# Altium PCB 四进四出三电机.PcbDoc (part 3 of 3)
Units mm, origin at the board's own origin, x right, y up, seen from the top; angles counter-clockwise.
Board outline 122.4 x 87.4 mm, 2 copper layers (Top Layer, Bottom Layer); 150 components, 163 nets, 541 pads, 64 vias.
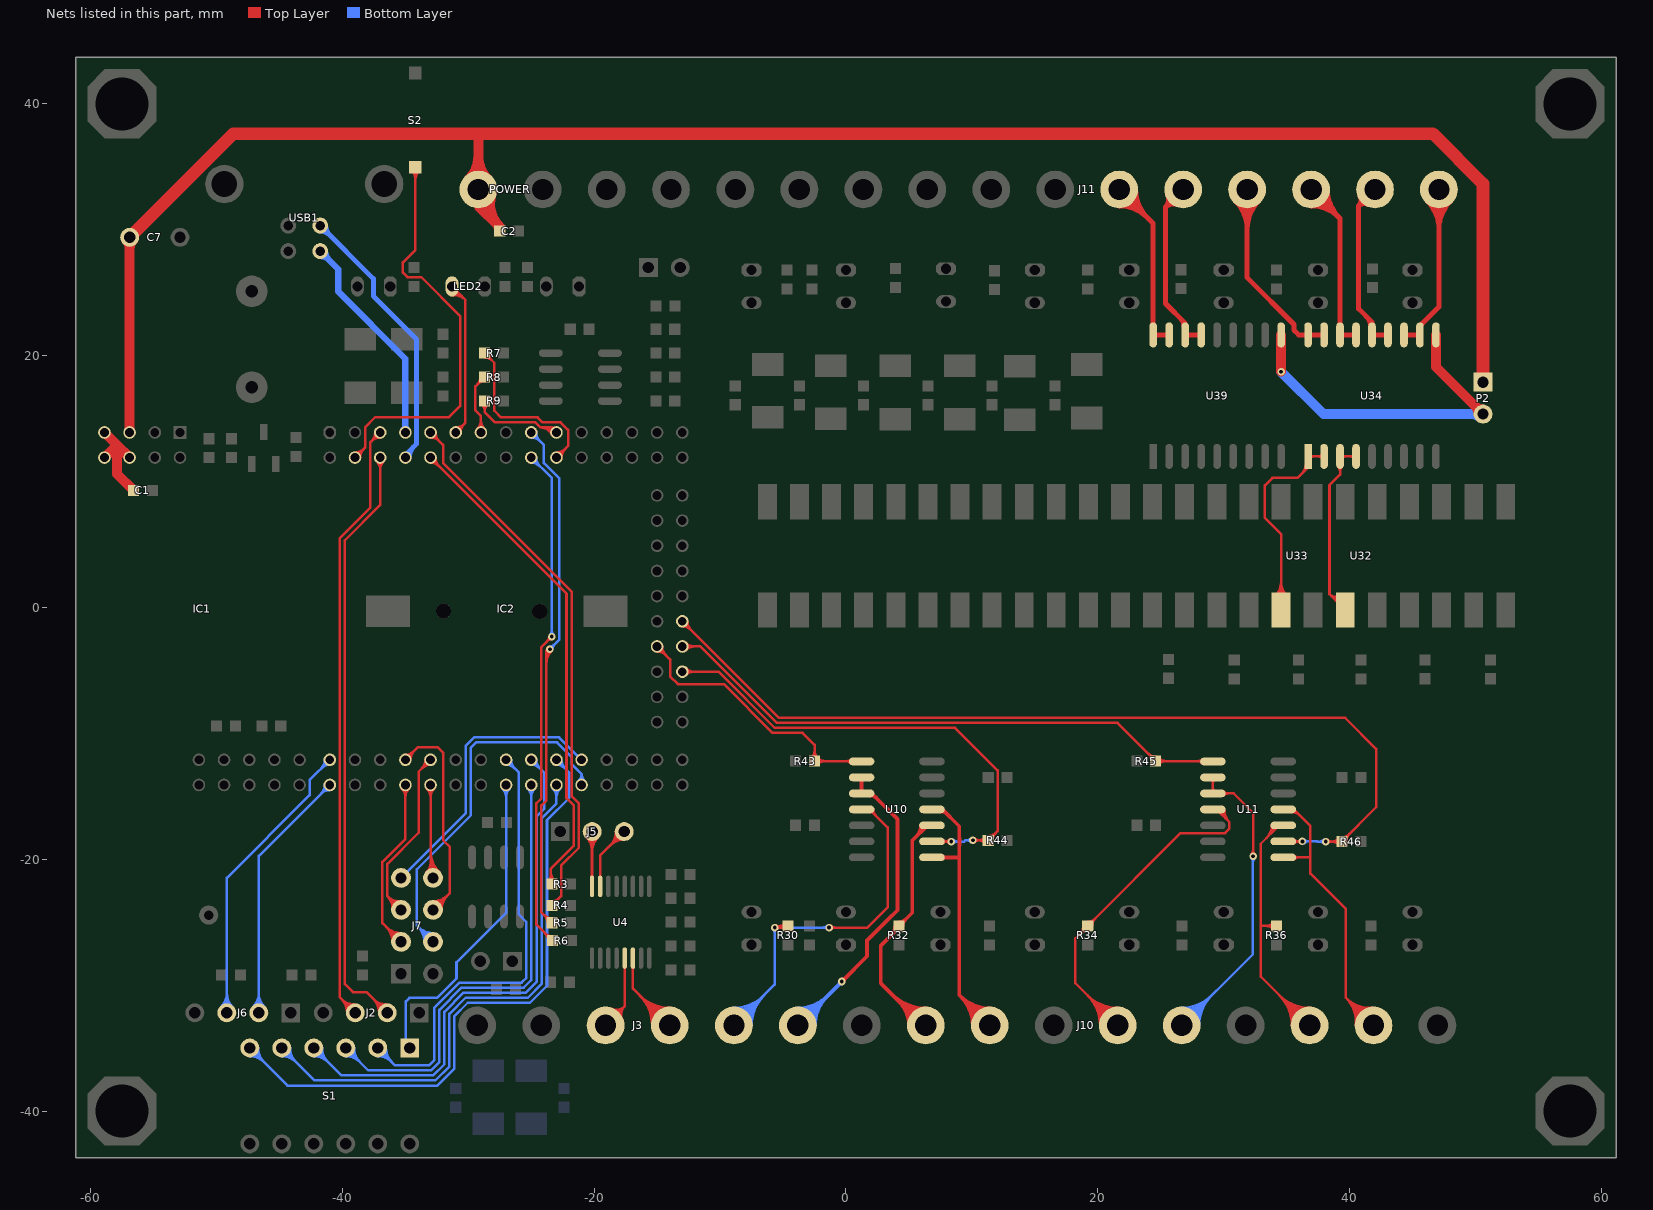
[diagram p3: the nets of this part, all layers, seen from the top]

## Via types
v1: diameter 0.6, hole 0.3, Top Layer to Bottom Layer, 64 vias

## Nets (pads, with @x,y where several pads share a name; then routed paths per layer and width w, separated by ;. In a path a pad name is that pad's centre, name@x,y a point inside that pad or via, vN(x,y) a via of type N, cw(c..) or ccw(c..) an arc to the next point about the centre after c; other vN are vias at no path point) (continued)
NetU32_3: U32.3 U34.3 U34.4 | length 20.1
  Top Layer w0.2: 38.572,0.888 ccw(c39.028,1.343) U32.3@39.4,0.817 ; 38.74,0.72 ccw(c39.167,1.147) U32.3@39.516,0.654 ; 38.908,0.552 ccw(c39.306,0.95) U32.3@39.631,0.491 ; U34.3@39.099,11.159 cw(c38.757,10.817) 39.24,10.817 cw(c39.723,10.817) U34.3@39.381,11.159 ; U32.3@39.284,0.981 cw(c38.889,1.539) 38.405,1.055 ; U34.3@39.381,11.859 cw(c39.723,11.517) 39.723,12 cw(c39.723,12.483) U34.3@39.381,12.141 ; U32.3@39.66,-0.2 38.405,1.055 ; U34.4@40.369,11.859 ccw(c40.027,11.517) 40.027,12 ccw(c40.027,12.483) U34.4@40.369,12.141 ; U34.4@40.51,12 U34.3@39.24,12 39.24,10.554 38.405,9.719 38.405,1.055
NetU33_3: U33.3 U34.1 U34.2 | length 23.3
  Top Layer w0.2: U33.3@34.1,0.91 ccw(c32.991,2.019) 34.56,2.019 ccw(c36.129,2.019) U33.3@35.02,0.91 ; U33.3@34.242,0.768 ccw(c33.474,1.536) 34.56,1.536 ccw(c35.646,1.536) U33.3@34.878,0.768 ; U33.3@34.56,-0.2 34.56,5.826 33.274,7.112 33.274,9.688 33.873,10.287 35.865,10.287 36.7,11.122 U34.1@36.7,12 U34.2@37.97,12 ; 36.233,10.655 ccw(c35.588,11.3) U34.1@36.5,11.3 ; 36.574,10.996 ccw(c36.271,11.3) U34.1@36.7,11.3 ; U34.1@36.841,11.859 cw(c37.183,11.517) 37.183,12 cw(c37.183,12.483) U34.1@36.841,12.141 ; U34.2@37.829,11.859 ccw(c37.487,11.517) 37.487,12 ccw(c37.487,12.483) U34.2@37.829,12.141
NRST: IC2.4 S2.1 | length 35.9
  Top Layer w0.2: IC2.4@-39,11.9 -38.2,12.7 -38.2,14.302 -37.389,15.113 -31.521,15.113 -30.645,15.989 -30.645,23.149 -33.736,26.24 -34.844,26.24 -35.204,26.6 -35.204,27.4 -34.2,28.404 S2.1@-34.2,34.95 ; IC2.4@-39,12.3 ccw(c-39,13.266) -38.317,12.583 ccw(c-37.634,11.9) IC2.4@-38.6,11.9 ; S2.1@-34.483,34.667 cw(c-35.166,33.984) -34.2,33.984 cw(c-33.234,33.984) S2.1@-33.917,34.667
OUTPUT1: J11.1 U34.11 U34.12 | length 21.8
  Top Layer w0.4: U34.12@44.32,21.65 U34.11@45.59,21.65 45.59,22.374 47.1,23.884 J11.1@47.1,33.2 ; J11.1@46.181,32.281 cw(c43.962,30.062) 47.1,30.062 cw(c50.238,30.062) J11.1@48.019,32.281 ; J11.1@46.464,32.564 cw(c44.927,31.027) 47.1,31.027 cw(c49.273,31.027) J11.1@47.736,32.564
OUTPUT2: J11.2 U34.13 U34.14 | length 16.2
  Top Layer w0.4: J11.2@40.845,32.643 cw(c40.251,32.361) 40.716,31.896 ; 41.392,23.044 cw(c40.698,22.35) U34.14@41.68,22.35 ; J11.2@41.463,32.025 ccw(c41.181,31.431) 40.716,31.896 ; J11.2@42.02,33.2 40.716,31.896 ; U34.13@43.05,21.65 U34.14@41.78,21.65 41.78,22.657 40.716,23.721 40.716,31.896
OUTPUT3: J11.3 U34.15 U34.16 | length 22.1
  Top Layer w0.4: J11.3@36.94,31.9 cw(c36.94,28.762) 39.159,30.981 cw(c41.378,33.2) J11.3@38.24,33.2 ; J11.3@36.94,32.3 cw(c36.94,30.127) 38.476,31.664 cw(c40.013,33.2) J11.3@37.84,33.2 ; J11.3@36.94,33.2 39.24,30.9 U34.16@39.24,21.65 U34.15@40.51,21.65
OUTPUT4: J11.4 U34.17 U34.18 | length 23.6
  Top Layer w0.4: J11.4@30.941,32.281 cw(c28.722,30.062) 31.86,30.062 cw(c34.998,30.062) J11.4@32.779,32.281 ; J11.4@31.224,32.564 cw(c29.687,31.027) 31.86,31.027 cw(c34.033,31.027) J11.4@32.496,32.564 ; J11.4@31.86,33.2 31.86,26.194 35.581,22.473 35.581,22.026 35.957,21.65 U34.18@36.7,21.65 U34.17@37.97,21.65
OUTPUT5: J11.5 U39.15 U39.16 | length 16.9
  Top Layer w0.4: J11.5@25.569,32.726 cw(c24.76,32.409) 25.375,31.795 ; J11.5@26.306,31.989 ccw(c25.989,31.18) 25.375,31.795 ; 26.613,22.898 cw(c26.065,22.35) U39.16@26.84,22.35 ; J11.5@26.94,33.04 J11.5@26.78,33.2 25.375,31.795 ; U39.15@28.21,21.65 U39.16@26.94,21.65 26.94,22.571 25.375,24.137 25.375,31.795
OUTPUT6: J11.6 U39.17 U39.18 | length 22.3
  Top Layer w0.4: J11.6@21.7,31.9 cw(c21.7,28.762) 23.919,30.981 cw(c26.138,33.2) J11.6@23,33.2 ; J11.6@21.7,32.3 cw(c21.7,30.127) 23.236,31.664 cw(c24.773,33.2) J11.6@22.6,33.2 ; J11.6@21.7,33.2 24.4,30.5 U39.18@24.4,21.65 U39.17@25.67,21.65
PD10: IC2.13 R8.1 | length 7.7
  Top Layer w0.2: IC2.13@-29.283,14.183 ccw(c-29.966,14.866) -29,14.866 ccw(c-28.034,14.866) IC2.13@-28.717,14.183 ; R8.1@-29.04,18.3 cw(c-29.861,18.3) -29.28,17.72 cw(c-28.7,17.139) R8.1@-28.7,17.96 ; IC2.13@-29,13.9 -29,15.22 -29.44,15.66 -29.44,17.56 R8.1@-28.7,18.3
PWM1: IC2.43 R43.1 U10.1 | length 26.4
  Top Layer w0.2: IC2.43@-15,-3.5 cw(c-15,-4.466) -14.317,-3.783 cw(c-13.634,-3.1) IC2.43@-14.6,-3.1 ; IC2.43@-15,-3.1 -13.97,-4.13 -13.97,-5.486 -13.36,-6.096 -9.701,-6.096 -5.828,-9.969 -3.442,-9.969 -2.5,-10.911 R43.1@-2.5,-12.2 1.21,-12.2 U10.1@1.242,-12.232 ; R43.1@-2.74,-11.96 ccw(c-3.321,-11.379) -2.5,-11.379 ccw(c-1.679,-11.379) -2.26,-11.96 ccw(c-1.679,-11.379) -1.679,-12.2 ccw(c-1.679,-13.021) R43.1@-2.26,-12.44 ; -0.041,-12.2 cw(c-0.041,-12.804) U10.1@0.386,-12.377 ; 0.114,-12.2 ccw(c0.114,-11.815) U10.1@0.386,-12.087
PWM1+: J10.1 R30.1 U10.4 | length 52.7
  Top Layer w0.2: v1@-5.564,-25.252 ccw(c-5.323,-24.834) -5.198,-25.3 ccw(c-5.073,-25.767) v1@-5.491,-25.525 ; v1@-5.523,-25.567 cw(c-5.181,-25.908) -5.181,-25.425 cw(c-5.181,-24.943) v1@-5.523,-25.284 ; -5.207,-25.425 ccw(c-5.207,-24.739) R30.1@-4.703,-25.205 ; -5.118,-25.425 cw(c-5.118,-25.818) R30.1@-4.84,-25.54 ; R30.1@-4.85,-25.069 cw(c-5.664,-24.316) v1(-5.664,-25.425) -4.725,-25.425 R30.1@-4.6,-25.3 ; v1(-1.346,-25.425) 1.702,-25.425 3.302,-23.825 3.302,-17.475 1.869,-16.042 U10.4@1.242,-16.042 ; v1@-1.205,-25.567 cw(c-0.863,-25.908) -0.863,-25.425 cw(c-0.863,-24.943) v1@-1.205,-25.284 ; U10.4@1.953,-16.247 cw(c1.953,-16.538) 2.159,-16.332 ; U10.4@2.158,-16.042 ccw(c2.856,-16.042) 2.362,-16.536
  Bottom Layer w0.2: J10.1@-8.9,-33.2 -5.664,-29.964 v1(-5.664,-25.425) v1(-1.346,-25.425) ; J10.1@-8.9,-32.4 ccw(c-8.9,-30.469) -7.534,-31.834 ccw(c-6.169,-33.2) J10.1@-8.1,-33.2 ; J10.1@-8.9,-32.2 ccw(c-8.9,-29.786) -7.193,-31.493 ccw(c-5.486,-33.2) J10.1@-7.9,-33.2 ; J10.1@-8.9,-32 ccw(c-8.9,-29.103) -6.851,-31.151 ccw(c-4.803,-33.2) J10.1@-7.7,-33.2 ; J10.1@-8.9,-31.8 ccw(c-8.9,-28.42) -6.51,-30.81 ccw(c-4.12,-33.2) J10.1@-7.5,-33.2 ; v1@-5.806,-25.567 cw(c-6.147,-25.908) -5.664,-25.908 cw(c-5.181,-25.908) -5.523,-25.567 cw(c-5.181,-25.908) -5.181,-25.425 cw(c-5.181,-24.943) v1@-5.523,-25.284 ; v1@-1.488,-25.567 ccw(c-1.829,-25.908) -1.829,-25.425 ccw(c-1.829,-24.943) v1@-1.488,-25.284
PWM1-: J10.2 U10.2 U10.3 | length 39.4
  Top Layer w0.3: v1(-0.33,-29.71) 1.676,-27.704 1.676,-26.449 3.615,-24.51 3.633,-24.51 4.089,-24.054 4.089,-16.815 2.047,-14.772 U10.3@1.242,-14.772 U10.2@1.242,-13.502 ; v1@-0.33,-29.56 ccw(c-0.33,-29.198) -0.074,-29.454 ccw(c0.182,-29.71) v1@-0.18,-29.71 ; U10.3@1.133,-14.663 ccw(c0.868,-14.398) 1.242,-14.398 ccw(c1.616,-14.398) U10.3@1.351,-14.663 ; U10.2@1.133,-13.611 cw(c0.868,-13.876) 1.242,-13.876 cw(c1.616,-13.876) U10.2@1.351,-13.611 ; U10.3@1.953,-14.927 cw(c1.953,-15.526) 2.377,-15.102
  Bottom Layer w0.3: J10.2@-3.82,-33.2 v1(-0.33,-29.71) ; J10.2@-3.82,-32.45 ccw(c-3.82,-30.639) -2.54,-31.92 ccw(c-1.259,-33.2) J10.2@-3.07,-33.2 ; J10.2@-3.82,-32.15 ccw(c-3.82,-29.615) -2.028,-31.408 ccw(c-0.235,-33.2) J10.2@-2.77,-33.2 ; J10.2@-3.82,-31.85 ccw(c-3.82,-28.591) -1.515,-30.895 ccw(c0.789,-33.2) J10.2@-2.47,-33.2 ; v1@-0.48,-29.71 cw(c-0.842,-29.71) -0.586,-29.966 cw(c-0.33,-30.222) v1@-0.33,-29.86
PWM2: IC2.46 R44.1 U10.9 | length 46.6
  Top Layer w0.2: IC2.46@-13,-5.1 -10.131,-5.1 -5.662,-9.569 8.674,-9.569 12.04,-12.936 12.04,-14.51 ; IC2.46@-12.717,-5.383 cw(c-12.034,-6.066) -12.034,-5.1 cw(c-12.034,-4.134) IC2.46@-12.717,-4.817 ; U10.9@6.83,-18.582 v1@8.346,-18.582 ; U10.9@7.686,-18.727 cw(c8.036,-19.076) 8.036,-18.582 cw(c8.036,-18.088) U10.9@7.686,-18.437 ; 7.848,-18.582 cw(c7.848,-19.102) v1@8.215,-18.734 ; 7.9,-18.582 ccw(c7.9,-18.136) v1@8.215,-18.451 ; v1(10.084,-18.491) 11.291,-18.491 R44.1@11.3,-18.5 12.04,-17.76 12.04,-14.51 ; v1@10.225,-18.633 cw(c10.567,-18.974) 10.567,-18.491 cw(c10.567,-18.008) v1@10.225,-18.35 ; 10.458,-18.491 cw(c10.458,-19.342) R44.1@11.06,-18.74 ; 10.501,-18.491 ccw(c10.501,-17.701) R44.1@11.06,-18.26 ; R44.1@11.3,-18.16 ccw(c11.3,-17.339) 11.88,-17.92 ccw(c12.461,-18.5) R44.1@11.64,-18.5
  Bottom Layer w0.2: v1(8.357,-18.593) 9.373,-18.593 9.474,-18.491 v1(10.084,-18.491) ; v1@8.498,-18.734 cw(c8.839,-19.076) 8.839,-18.593 cw(c8.839,-18.11) v1@8.498,-18.451 ; v1@9.942,-18.633 ccw(c9.601,-18.974) 9.601,-18.491 ccw(c9.601,-18.008) v1@9.942,-18.35
PWM2+: J10.4 R32.1 U10.10 | length 33.9
  Top Layer w0.3: 3.617,-26.009 ccw(c2.908,-25.3) R32.1@3.91,-25.3 ; 3.645,-30.734 ccw(c6.34,-28.038) J10.4@6.34,-31.85 ; R32.1@3.918,-25.707 cw(c4.2,-25.988) R32.1@4.2,-25.59 ; 4.157,-31.246 ccw(c6.34,-29.062) J10.4@6.34,-32.15 ; 4.197,-31.286 cw(c2.284,-33.2) J10.4@4.99,-33.2 ; R32.1@4.2,-25.01 ccw(c4.2,-24.31) 4.695,-24.805 ccw(c5.19,-25.3) R32.1@4.49,-25.3 ; 4.669,-31.758 ccw(c6.34,-30.087) J10.4@6.34,-32.45 ; 4.709,-31.798 cw(c3.308,-33.2) J10.4@5.29,-33.2 ; 5.611,-18.163 ccw(c4.76,-17.312) U10.10@5.964,-17.312 ; 6.123,-17.651 ccw(c5.784,-17.312) U10.10@6.264,-17.312 ; J10.4@6.34,-33.2 6.111,-33.2 2.769,-29.858 2.769,-26.856 4.2,-25.425 R32.1@4.2,-25.3 5.258,-24.242 5.258,-18.517 6.463,-17.312 U10.10@6.83,-17.312
PWM2-: J10.5 U10.8 U10.11 | length 34.8
  Top Layer w0.3: U10.8@6.83,-19.852 9.002,-19.852 ; U10.11@6.83,-16.042 7.66,-16.042 9.002,-17.384 9.002,-18.319 9.007,-18.324 9.007,-18.862 9.002,-18.866 9.002,-19.852 ; U10.11@7.541,-16.197 cw(c7.541,-16.857) 8.008,-16.39 ; U10.8@7.651,-19.961 cw(c7.915,-20.226) 7.915,-19.852 cw(c7.915,-19.478) U10.8@7.651,-19.743 ; J10.5@10.07,-33.2 ccw(c6.811,-33.2) 9.115,-30.895 ccw(c11.42,-28.591) J10.5@11.42,-31.85 ; J10.5@10.37,-33.2 ccw(c7.835,-33.2) 9.628,-31.408 ccw(c11.42,-29.615) J10.5@11.42,-32.15 ; J10.5@10.67,-33.2 ccw(c8.859,-33.2) 10.14,-31.92 ccw(c11.42,-30.639) J10.5@11.42,-32.45 ; J10.5@11.42,-33.2 9.002,-30.782 9.002,-19.852
PWM3: IC2.44 R45.1 U11.1 | length 50.8
  Top Layer w0.2: IC2.44@-13,-3.1 -11.566,-3.1 -5.496,-9.169 21.569,-9.169 R45.1@24.6,-12.2 29.11,-12.2 U11.1@29.142,-12.232 ; IC2.44@-12.717,-3.383 cw(c-12.034,-4.066) -12.034,-3.1 cw(c-12.034,-2.134) IC2.44@-12.717,-2.817 ; R45.1@24.26,-12.2 ccw(c23.439,-12.2) 24.02,-11.62 ccw(c24.6,-11.039) R45.1@24.6,-11.86 ; R45.1@24.84,-12.44 cw(c25.421,-13.021) 25.421,-12.2 cw(c25.421,-11.379) R45.1@24.84,-11.96 ; 27.859,-12.2 cw(c27.859,-12.804) U11.1@28.286,-12.377 ; 28.014,-12.2 ccw(c28.014,-11.815) U11.1@28.286,-12.087
PWM3+: J10.7 R34.1 U11.4 | length 48.8
  Top Layer w0.2: R34.1@18.86,-25.3 cw(c18.039,-25.3) 18.62,-25.88 cw(c19.2,-26.461) R34.1@19.2,-25.64 ; R34.1@19.2,-24.96 ccw(c19.2,-24.139) 19.78,-24.72 ccw(c20.361,-25.3) R34.1@19.54,-25.3 ; J10.7@20.18,-33.2 ccw(c16.8,-33.2) 19.19,-30.81 ccw(c21.58,-28.42) J10.7@21.58,-31.8 ; J10.7@20.38,-33.2 ccw(c17.483,-33.2) 19.531,-31.151 ccw(c21.58,-29.103) J10.7@21.58,-32 ; J10.7@20.58,-33.2 ccw(c18.166,-33.2) 19.873,-31.493 ccw(c21.58,-29.786) J10.7@21.58,-32.2 ; J10.7@20.78,-33.2 ccw(c18.849,-33.2) 20.214,-31.834 ccw(c21.58,-30.469) J10.7@21.58,-32.4 ; J10.7@21.58,-33.2 18.212,-29.832 18.212,-26.288 R34.1@19.2,-25.3 26.583,-17.917 30.104,-17.917 30.458,-17.563 30.458,-17.061 29.439,-16.042 U11.4@29.142,-16.042 U11.4@29.885,-16.042 ; U11.4@29.458,-16.029 ccw(c29.531,-16.031) U11.4@29.48,-16.083 ; U11.4@29.658,-16.036 ccw(c30.163,-16.052) 29.806,-16.409 ; U11.4@29.858,-16.042 ccw(c30.794,-16.073) 30.132,-16.735 ; U11.4@30.058,-16.049 ccw(c31.426,-16.094) 30.458,-17.061
PWM3-: J10.8 U11.2 U11.3 | length 44.9
  Top Layer w0.2: U11.3@28.997,-14.627 ccw(c28.648,-14.278) 29.142,-14.278 ccw(c29.636,-14.278) U11.3@29.287,-14.627 ; U11.2@28.997,-13.647 cw(c28.648,-13.996) 29.142,-13.996 cw(c29.636,-13.996) U11.2@29.287,-13.647 ; U11.2@29.142,-13.502 U11.3@29.142,-14.772 30.799,-14.772 32.334,-16.307 v1(32.334,-19.761) ; U11.3@29.998,-14.917 cw(c30.348,-15.266) 30.348,-14.772 cw(c30.348,-14.278) U11.3@29.998,-14.627 ; v1@32.193,-19.62 ccw(c31.851,-19.278) 32.334,-19.278 ccw(c32.817,-19.278) v1@32.476,-19.62
  Bottom Layer w0.2: J10.8@26.66,-33.2 32.309,-27.551 v1@32.309,-19.685 ; J10.8@26.66,-32.4 ccw(c26.66,-30.469) 28.026,-31.834 ccw(c29.391,-33.2) J10.8@27.46,-33.2 ; J10.8@26.66,-32.2 ccw(c26.66,-29.786) 28.367,-31.493 ccw(c30.074,-33.2) J10.8@27.66,-33.2 ; J10.8@26.66,-32 ccw(c26.66,-29.103) 28.709,-31.151 ccw(c30.757,-33.2) J10.8@27.86,-33.2 ; J10.8@26.66,-31.8 ccw(c26.66,-28.42) 29.05,-30.81 ccw(c31.44,-33.2) J10.8@28.06,-33.2 ; v1@32.193,-19.903 cw(c31.913,-20.183) 32.309,-20.183 ; 32.309,-20.305 cw(c32.878,-20.305) v1@32.476,-19.903
PWM4: IC2.42 R46.1 U11.9 | length 80.4
  Top Layer w0.2: IC2.42@-13,-1.5 cw(c-13,-2.466) -12.317,-1.783 cw(c-11.634,-1.1) IC2.42@-12.6,-1.1 ; IC2.42@-13,-1.1 -5.331,-8.769 39.656,-8.769 42.113,-11.227 42.113,-15.872 39.393,-18.593 v1(38.1,-18.593) ; U11.9@34.73,-18.582 v1(36.257,-18.582) ; U11.9@35.586,-18.727 cw(c35.936,-19.076) 35.936,-18.582 cw(c35.936,-18.088) U11.9@35.586,-18.437 ; v1@36.115,-18.723 ccw(c35.774,-19.065) 35.774,-18.582 ccw(c35.774,-18.099) v1@36.115,-18.441 ; v1@38.241,-18.734 cw(c38.583,-19.076) 38.583,-18.593 cw(c38.583,-18.11) v1@38.241,-18.451 ; 38.562,-18.593 cw(c38.562,-19.438) R46.1@39.16,-18.84 ; 38.597,-18.593 ccw(c38.597,-17.797) R46.1@39.16,-18.36 ; R46.1@39.4,-18.26 ccw(c39.4,-17.474) 39.956,-18.03 ; R46.1@39.74,-18.6 cw(c40.596,-18.6) 39.991,-17.995
  Bottom Layer w0.2: v1(36.257,-18.582) 37.429,-18.582 37.44,-18.593 v1(38.1,-18.593) ; v1@36.398,-18.723 cw(c36.739,-19.065) 36.739,-18.582 cw(c36.739,-18.099) v1@36.398,-18.441 ; v1@37.959,-18.734 ccw(c37.617,-19.076) 37.617,-18.593 ccw(c37.617,-18.11) v1@37.959,-18.451
PWM4+: J10.10 R36.1 U11.10 | length 39.9
  Top Layer w0.2: 33.398,-18.316 ccw(c32.394,-17.312) U11.10@33.814,-17.312 ; 33.739,-17.975 ccw(c33.076,-17.312) U11.10@34.014,-17.312 ; R36.1@33.96,-25.54 ccw(c33.379,-26.121) 33.379,-25.3 ccw(c33.379,-24.479) R36.1@33.96,-25.06 ; 34.081,-17.634 ccw(c33.759,-17.312) U11.10@34.214,-17.312 ; R36.1@34.2,-25.3 32.945,-25.3 32.944,-25.298 ; U11.10@34.73,-17.312 34.402,-17.312 32.944,-18.771 32.944,-25.298 ; J10.10@35.42,-33.2 ccw(c32.04,-33.2) 34.43,-30.81 ccw(c36.82,-28.42) J10.10@36.82,-31.8 ; J10.10@35.62,-33.2 ccw(c32.723,-33.2) 34.771,-31.151 ccw(c36.82,-29.103) J10.10@36.82,-32 ; J10.10@35.82,-33.2 ccw(c33.406,-33.2) 35.113,-31.493 ccw(c36.82,-29.786) J10.10@36.82,-32.2 ; J10.10@36.02,-33.2 ccw(c34.089,-33.2) 35.454,-31.834 ccw(c36.82,-30.469) J10.10@36.82,-32.4 ; J10.10@36.82,-33.2 32.944,-29.324 32.944,-25.298
PWM4-: J10.11 U11.8 U11.11 | length 38.8
  Top Layer w0.2: U11.8@34.73,-19.852 36.87,-19.852 36.881,-19.863 ; U11.11@34.73,-16.042 35.575,-16.042 36.881,-17.348 36.881,-19.863 ; U11.11@35.441,-16.247 cw(c35.441,-17.063) 36.019,-16.486 ; U11.8@35.586,-19.997 cw(c35.936,-20.346) 35.936,-19.852 cw(c35.936,-19.358) U11.8@35.586,-19.707 ; J10.11@40.503,-33.116 ccw(c37.751,-32.949) 39.7,-31 ; J10.11@40.702,-33.128 ccw(c38.344,-32.985) 40.015,-31.315 ccw(c41.685,-29.644) J10.11@41.828,-32.002 ; J10.11@40.902,-33.14 ccw(c38.937,-33.021) 40.329,-31.629 ccw(c41.721,-30.237) J10.11@41.84,-32.202 ; J10.11@41.101,-33.152 ccw(c39.529,-33.057) 40.643,-31.943 ccw(c41.757,-30.829) J10.11@41.852,-32.401 ; J10.11@41.816,-31.803 cw(c41.649,-29.051) 39.7,-31 ; J10.11@41.9,-33.2 39.7,-31 ; 36.881,-19.863 36.881,-21.133 39.7,-23.952 39.7,-31
RJ45_RX: J5.2 U4.8 | length 8.8
  Top Layer w0.2: J5.2@-20.62,-18.26 cw(c-21.693,-19.333) -20.175,-19.333 ; J5.2@-20.478,-18.118 cw(c-21.21,-18.85) -20.175,-18.85 ; U4.8@-20.228,-21.422 ccw(c-20.356,-21.294) -20.175,-21.294 ccw(c-19.994,-21.294) U4.8@-20.122,-21.422 ; U4.8@-20.175,-22.15 -20.175,-17.815 J5.2@-20.16,-17.8 ; -20.175,-19.405 cw(c-18.555,-19.405) J5.2@-19.7,-18.26 ; -20.175,-18.923 cw(c-19.037,-18.923) J5.2@-19.842,-18.118
RJ45_TX: J5.3 U4.7 | length 9.6
  Top Layer w0.2: U4.7@-19.578,-21.422 ccw(c-19.706,-21.294) -19.525,-21.294 ccw(c-19.344,-21.294) U4.7@-19.472,-21.422 ; U4.7@-19.525,-22.15 -19.525,-19.705 J5.3@-17.62,-17.8 ; J5.3@-18.27,-17.8 cw(c-19.839,-17.8) -18.73,-18.91 cw(c-17.62,-20.019) J5.3@-17.62,-18.45 ; J5.3@-18.07,-17.8 cw(c-19.156,-17.8) -18.388,-18.568 cw(c-17.62,-19.336) J5.3@-17.62,-18.25
RS232_RX: J3.1 U4.13 | length 12
  Top Layer w0.2: J3.1@-19.1,-33.2 -17.575,-31.675 ; J3.1@-18.742,-32.266 ccw(c-18.496,-31.625) -18.011,-32.111 ccw(c-17.525,-32.596) J3.1@-18.166,-32.842 ; J3.1@-18.67,-32.08 ccw(c-18.375,-31.31) -17.793,-31.893 ccw(c-17.21,-32.475) J3.1@-17.98,-32.77 ; J3.1@-18.599,-31.893 ccw(c-18.255,-30.996) -17.575,-31.675 ; J3.1@-17.793,-32.699 cw(c-16.896,-32.355) -17.575,-31.675 ; U4.13@-17.628,-28.578 cw(c-17.756,-28.706) -17.575,-28.706 cw(c-17.394,-28.706) U4.13@-17.522,-28.578 ; U4.13@-17.575,-27.85 -17.575,-31.675
RS232_TX: J3.2 U4.14 | length 23.5
  Top Layer w0.2: U4.14@-16.978,-28.578 cw(c-17.106,-28.706) -16.925,-28.706 cw(c-16.744,-28.706) U4.14@-16.872,-28.578 ; U4.14@-16.925,-27.85 -16.925,-30.275 J3.2@-14,-33.2 ; J3.2@-15.4,-33.2 ccw(c-18.78,-33.2) -16.39,-30.81 ccw(c-14,-28.42) J3.2@-14,-31.8 ; J3.2@-15.2,-33.2 ccw(c-18.097,-33.2) -16.049,-31.151 ccw(c-14,-29.103) J3.2@-14,-32 ; J3.2@-15,-33.2 ccw(c-17.414,-33.2) -15.707,-31.493 ccw(c-14,-29.786) J3.2@-14,-32.2 ; J3.2@-14.8,-33.2 ccw(c-16.731,-33.2) -15.366,-31.834 ccw(c-14,-30.469) J3.2@-14,-32.4
RUN_LED: IC2.11 LED2.K | length 16
  Top Layer w0.2: LED2.K@-31.3,25.5 -30.245,24.445 ; LED2.K@-31.278,25.001 cw(c-31.182,24.1) -30.541,24.741 ; LED2.K@-31.257,24.802 cw(c-31.124,23.566) -30.245,24.445 ; IC2.11@-31,13.9 -30.245,14.655 -30.245,24.445 ; IC2.11@-31,14.3 ccw(c-31,15.266) -30.317,14.583 ccw(c-29.634,13.9) IC2.11@-30.6,13.9 ; LED2.K@-30.892,25.208 ccw(c-30.612,25.208) -30.81,25.01
RX1: IC2.10 R3.1 | length 42.7
  Top Layer w0.2: IC2.10@-33,11.5 cw(c-33,10.534) -32.317,11.217 cw(c-31.634,11.9) IC2.10@-32.6,11.9 ; IC2.10@-33,11.9 -22.2,1.1 -22.2,-15.145 -21.61,-15.735 -21.61,-18.923 -23.47,-20.783 R3.1@-23.47,-21.971 ; R3.1@-23.608,-21.731 ccw(c-23.944,-21.395) -23.47,-21.395 ; -23.47,-21.388 ccw(c-22.785,-21.388) R3.1@-23.269,-21.872 ; -23.47,-20.905 ccw(c-22.302,-20.905) R3.1@-23.128,-21.731
RX2: IC2.18 R6.1 | length 44.4
  Top Layer w0.2: R6.1@-23.657,-26.467 ccw(c-24.478,-26.467) -23.898,-25.886 ccw(c-23.317,-25.306) R6.1@-23.317,-26.127 ; v1@-23.568,-2.311 cw(c-24.051,-2.311) -23.709,-2.653 cw(c-23.368,-2.994) v1@-23.368,-2.511 ; v1(-23.368,-2.311) -24.2,-3.143 -24.2,-15.158 -24.595,-15.553 -24.595,-25.189 R6.1@-23.317,-26.467
  Bottom Layer w0.2: IC2.18@-25,11.5 cw(c-25,10.534) -24.317,11.217 cw(c-23.634,11.9) IC2.18@-24.6,11.9 ; IC2.18@-25,11.9 -23.368,10.268 v1(-23.368,-2.311) ; v1@-23.509,-2.17 ccw(c-23.851,-1.829) -23.368,-1.829 ccw(c-22.885,-1.829) v1@-23.227,-2.17
RX3: IC2.20 R7.1 | length 16.8
  Top Layer w0.2: R7.1@-28.7,19.86 cw(c-28.7,19.039) -28.12,19.62 cw(c-27.539,20.2) R7.1@-28.36,20.2 ; R7.1@-28.7,20.2 -27.94,19.44 -27.94,15.633 -27.407,15.1 -24.503,15.1 -24.103,14.7 -22.669,14.7 -22.073,14.104 -22.073,12.827 IC2.20@-23,11.9 ; IC2.20@-23,12.3 ccw(c-23,13.266) -22.317,12.583 ccw(c-21.634,11.9) IC2.20@-22.6,11.9
RX4: IC2.80 J6.2 | length 26.1
  Bottom Layer w0.2: J6.2@-47.1,-31.74 ccw(c-48.209,-30.631) -46.64,-30.631 ccw(c-45.071,-30.631) J6.2@-46.18,-31.74 ; J6.2@-46.958,-31.882 ccw(c-47.726,-31.114) -46.64,-31.114 ccw(c-45.554,-31.114) J6.2@-46.322,-31.882 ; J6.2@-46.64,-32.2 -46.64,-19.74 IC2.80@-41,-14.1 ; IC2.80@-41.4,-14.1 cw(c-42.366,-14.1) -41.683,-14.783 cw(c-41,-15.466) IC2.80@-41,-14.5
SPI3_CE: IC2.60 J7.3 | length 34.7
  Bottom Layer w0.2: J7.3@-33.487,-26.56 ccw(c-35.147,-26.56) -33.973,-25.387 ccw(c-32.8,-24.213) J7.3@-32.8,-25.873 ; J7.3@-33.287,-26.56 ccw(c-34.464,-26.56) -33.632,-25.728 ccw(c-32.8,-24.896) J7.3@-32.8,-26.073 ; J7.3@-32.8,-26.56 -34.087,-25.273 -34.087,-20.792 -29.8,-16.506 -29.8,-11.138 -29.375,-10.712 -22.953,-10.712 -21.8,-11.866 -21.8,-12.431 -21,-13.231 ; IC2.60@-21.26,-13.796 ccw(c-21.743,-13.231) -21,-13.231 ; IC2.60@-21,-14.1 -21,-13.231 ; IC2.60@-20.74,-13.796 cw(c-20.257,-13.231) -21,-13.231
SPI3_CLK: IC2.73 J7.5 | length 22.8
  Top Layer w0.2: IC2.73@-35,-12.1 -34,-11.1 -32.436,-11.1 -32.004,-11.532 -32.004,-18.491 -31.471,-19.025 -31.471,-22.691 J7.5@-32.8,-24.02 ; IC2.73@-35,-11.7 ccw(c-35,-10.734) -34.317,-11.417 ccw(c-33.634,-12.1) IC2.73@-34.6,-12.1 ; J7.5@-32.8,-23.533 ccw(c-32.8,-22.356) -31.968,-23.188 ccw(c-31.136,-24.02) J7.5@-32.313,-24.02 ; J7.5@-32.8,-23.333 ccw(c-32.8,-21.673) -31.627,-22.847 ccw(c-30.453,-24.02) J7.5@-32.113,-24.02
SPI3_CS: IC2.74 J7.4 | length 19.8
  Top Layer w0.2: J7.4@-36.027,-26.56 ccw(c-37.687,-26.56) -36.513,-25.387 ccw(c-35.34,-24.213) J7.4@-35.34,-25.873 ; J7.4@-35.827,-26.56 ccw(c-37.004,-26.56) -36.172,-25.728 ccw(c-35.34,-24.896) J7.4@-35.34,-26.073 ; J7.4@-35.34,-26.56 -36.827,-25.073 -36.827,-20.209 -35,-18.382 IC2.74@-35,-14.1 ; IC2.74@-35.283,-14.383 cw(c-35.966,-15.066) -35,-15.066 cw(c-34.034,-15.066) IC2.74@-34.717,-14.383
SPI3_IRQ: IC2.59 J7.8 | length 22.9
  Bottom Layer w0.2: J7.8@-35.34,-21.48 -30.2,-16.34 -30.2,-10.972 -29.54,-10.312 -22.788,-10.312 IC2.59@-21,-12.1
SPI3_MISO: IC2.72 J7.7 | length 14.1
  Top Layer w0.2: J7.7@-33.286,-20.994 ccw(c-33.977,-20.303) -33,-20.303 ccw(c-31.623,-20.303) J7.7@-32.597,-21.277 ; IC2.72@-33.283,-14.383 cw(c-33.966,-15.066) -33,-15.066 cw(c-32.034,-15.066) IC2.72@-32.717,-14.383 ; -33,-19.82 ccw(c-31.14,-19.82) J7.7@-32.455,-21.135 ; -33,-19.338 ccw(c-30.658,-19.338) J7.7@-32.314,-20.994 ; IC2.72@-33,-14.1 -33,-21.28 J7.7@-32.8,-21.48
SPI3_MOSI: IC2.71 J7.6 | length 19.3
  Top Layer w0.2: J7.6@-36.026,-23.982 ccw(c-37.401,-23.906) -36.427,-22.933 ; J7.6@-35.827,-23.993 ccw(c-36.801,-23.939) -36.111,-23.249 ccw(c-35.421,-22.559) J7.6@-35.367,-23.533 ; J7.6@-35.378,-23.334 cw(c-35.454,-21.959) -36.427,-22.933 ; J7.6@-35.34,-24.02 -36.427,-22.933 ; IC2.71@-33.4,-12.1 cw(c-34.366,-12.1) -33.683,-12.783 cw(c-33,-13.466) IC2.71@-33,-12.5 ; IC2.71@-33,-12.1 -33.934,-13.034 -33.934,-17.882 -36.427,-20.375 -36.427,-22.933
SW1: IC2.66 S1.1 | length 27.1
  Bottom Layer w0.2: S1.1@-34.65,-34.99 -34.95,-34.69 -34.95,-31.293 -34.671,-31.013 -32.487,-31.013 -30.938,-29.464 -30.938,-28.194 -27,-24.257 IC2.66@-27,-14.1 ; IC2.66@-27.283,-14.383 cw(c-27.966,-15.066) -27,-15.066 cw(c-26.034,-15.066) IC2.66@-26.717,-14.383
SW2: IC2.65 S1.2 | length 41.4
  Bottom Layer w0.2: S1.2@-37.19,-35.64 cw(c-37.19,-37.209) -36.08,-36.1 cw(c-34.971,-34.99) S1.2@-36.54,-34.99 ; S1.2@-37.19,-35.44 cw(c-37.19,-36.526) -36.422,-35.758 cw(c-35.654,-34.99) S1.2@-36.74,-34.99 ; S1.2@-37.19,-34.99 -35.807,-36.373 -33.124,-36.373 -32.7,-35.949 -32.7,-31.792 -30.708,-29.8 -25.764,-29.8 -25.4,-29.436 -25.4,-24.968 -25.984,-24.384 -25.984,-13.116 IC2.65@-27,-12.1 ; IC2.65@-27,-12.5 cw(c-27,-13.466) -26.317,-12.783 cw(c-25.634,-12.1) IC2.65@-26.6,-12.1
SW3: IC2.64 S1.3 | length 42.1
  Bottom Layer w0.2: S1.3@-39.73,-35.64 cw(c-39.73,-37.209) -38.62,-36.1 cw(c-37.511,-34.99) S1.3@-39.08,-34.99 ; S1.3@-39.73,-35.44 cw(c-39.73,-36.526) -38.962,-35.758 cw(c-38.194,-34.99) S1.3@-39.28,-34.99 ; S1.3@-39.73,-34.99 -37.947,-36.773 -32.958,-36.773 -32.3,-36.115 -32.3,-31.957 -30.543,-30.2 -25.598,-30.2 -25,-29.602 IC2.64@-25,-14.1 ; IC2.64@-25.283,-14.383 cw(c-25.966,-15.066) -25,-15.066 cw(c-24.034,-15.066) IC2.64@-24.717,-14.383
SW4: IC2.63 S1.4 | length 48.1
  Bottom Layer w0.2: S1.4@-42.27,-35.64 cw(c-42.27,-37.209) -41.16,-36.1 cw(c-40.051,-34.99) S1.4@-41.62,-34.99 ; S1.4@-42.27,-35.44 cw(c-42.27,-36.526) -41.502,-35.758 cw(c-40.734,-34.99) S1.4@-41.82,-34.99 ; S1.4@-42.27,-34.99 -40.087,-37.173 -32.793,-37.173 -31.9,-36.28 -31.9,-32.123 -30.377,-30.6 -25.432,-30.6 -24.55,-29.718 -24.55,-16.561 -23.952,-15.963 -23.952,-13.148 IC2.63@-25,-12.1 ; IC2.63@-25,-12.5 cw(c-25,-13.466) -24.317,-12.783 cw(c-23.634,-12.1) IC2.63@-24.6,-12.1
SW5: IC2.62 S1.5 | length 49.3
  Bottom Layer w0.2: S1.5@-44.81,-35.64 cw(c-44.81,-37.209) -43.7,-36.1 cw(c-42.591,-34.99) S1.5@-44.16,-34.99 ; S1.5@-44.81,-35.44 cw(c-44.81,-36.526) -44.042,-35.758 cw(c-43.274,-34.99) S1.5@-44.36,-34.99 ; S1.5@-44.81,-34.99 -42.227,-37.573 -32.627,-37.573 -31.5,-36.446 -31.5,-32.289 -30.211,-31 -25.266,-31 -24.15,-29.884 -24.15,-16.726 -23,-15.576 IC2.62@-23,-14.1 ; IC2.62@-23.283,-14.383 cw(c-23.966,-15.066) -23,-15.066 cw(c-22.034,-15.066) IC2.62@-22.717,-14.383
SW6: IC2.61 S1.6 | length 55.4
  Bottom Layer w0.2: S1.6@-47.35,-35.64 cw(c-47.35,-37.209) -46.24,-36.1 cw(c-45.131,-34.99) S1.6@-46.7,-34.99 ; S1.6@-47.35,-35.44 cw(c-47.35,-36.526) -46.582,-35.758 cw(c-45.814,-34.99) S1.6@-46.9,-34.99 ; S1.6@-47.35,-34.99 -44.367,-37.973 -32.461,-37.973 -31.1,-36.612 -31.1,-32.454 -30.046,-31.4 -25.101,-31.4 -23.75,-30.049 -23.75,-16.892 -21.971,-15.113 -21.971,-13.129 IC2.61@-23,-12.1 ; IC2.61@-23,-12.5 cw(c-23,-13.466) -22.317,-12.783 cw(c-21.634,-12.1) IC2.61@-22.6,-12.1
SWDCK: IC2.6 J2.2 | length 53
  Top Layer w0.2: IC2.6@-37.283,11.617 cw(c-37.966,10.934) -37,10.934 cw(c-36.034,10.934) IC2.6@-36.717,11.617 ; J2.2@-37.09,-32.2 ccw(c-38.659,-32.2) -37.55,-31.09 ccw(c-36.44,-29.981) J2.2@-36.44,-31.55 ; IC2.6@-37,11.9 -37,8.136 -39.8,5.336 -39.8,-29.923 -39.167,-30.556 -38.084,-30.556 J2.2@-36.44,-32.2 ; J2.2@-36.89,-32.2 ccw(c-37.976,-32.2) -37.208,-31.432 ccw(c-36.44,-30.664) J2.2@-36.44,-31.75
SWDIO: IC2.5 J2.3 | length 53.6
  Top Layer w0.2: J2.3@-39.63,-32.2 ccw(c-41.199,-32.2) -40.09,-31.09 ccw(c-38.98,-29.981) J2.3@-38.98,-31.55 ; J2.3@-39.43,-32.2 ccw(c-40.516,-32.2) -39.748,-31.432 ccw(c-38.98,-30.664) J2.3@-38.98,-31.75 ; J2.3@-38.98,-32.2 -40.2,-30.98 -40.2,5.501 -37.8,7.901 -37.8,13.1 IC2.5@-37,13.9 ; IC2.5@-37.4,13.9 cw(c-38.366,13.9) -37.683,13.217 cw(c-37,12.534) IC2.5@-37,13.5
TX1: IC2.9 R4.1 | length 46.2
  Top Layer w0.2: IC2.9@-33,13.5 cw(c-33,12.534) -32.317,13.217 cw(c-31.634,13.9) IC2.9@-32.6,13.9 ; IC2.9@-33,13.9 -32.004,12.904 -32.004,11.47 -21.8,1.266 -21.8,-14.979 -21.21,-15.569 -21.21,-19.089 -22.628,-20.507 -22.628,-22.933 R4.1@-23.368,-23.673 ; R4.1@-23.368,-23.333 ccw(c-23.368,-22.512) -22.788,-23.092 ccw(c-22.207,-23.673) R4.1@-23.028,-23.673
TX2: IC2.17 R5.1 | length 47.2
  Top Layer w0.2: -23.8,-4.47 cw(c-22.362,-4.47) v1@-23.379,-3.454 ; -23.8,-3.987 cw(c-22.845,-3.987) v1(-23.52,-3.312) -23.8,-3.592 ; -23.8,-3.505 cw(c-23.328,-3.505) v1@-23.662,-3.171 ; v1@-23.718,-3.342 cw(c-24.006,-3.386) -23.8,-3.592 ; R5.1@-23.708,-25.044 ccw(c-24.529,-25.044) -23.948,-24.464 ccw(c-23.368,-23.884) R5.1@-23.368,-24.704 ; v1@-23.551,-3.51 ccw(c-23.594,-3.798) -23.8,-3.592 ; R5.1@-23.368,-25.044 -24.195,-24.217 -24.195,-15.718 -23.8,-15.323 -23.8,-3.592
  Bottom Layer w0.2: IC2.17@-25,13.5 cw(c-25,12.534) -24.317,13.217 cw(c-23.634,13.9) IC2.17@-24.6,13.9 ; IC2.17@-25,13.9 -24,12.9 -24,11.465 -22.768,10.234 -22.768,-2.56 v1(-23.52,-3.312) ; v1@-23.52,-3.112 ccw(c-23.52,-2.629) -23.179,-2.971 ccw(c-22.838,-3.312) v1@-23.32,-3.312
TX3: IC2.19 R9.1 | length 12.5
  Top Layer w0.2: R9.1@-28.94,16.16 cw(c-29.521,15.579) -28.7,15.579 cw(c-27.879,15.579) R9.1@-28.46,16.16 ; R9.1@-28.7,16.4 -28.7,15.517 -27.883,14.7 -24.669,14.7 -24.269,14.3 ; -23.951,14.3 cw(c-23.951,13.446) IC2.19@-23.18,13.814 ; -23.634,14.3 cw(c-23.634,13.597) IC2.19@-23,13.9 -23.4,14.3 ; IC2.19@-23.361,13.728 ccw(c-24.269,13.294) -24.269,14.3 ; IC2.19@-23.361,14.072 ccw(c-23.541,14.159) -23.4,14.3 ; -23.317,14.3 cw(c-23.317,13.749) IC2.19@-22.82,13.986 ; IC2.19@-23.172,14.261 cw(c-23.259,14.441) -23.4,14.3 ; -24.269,14.3 -23.4,14.3
TX4: IC2.79 J6.3 | length 29.2
  Bottom Layer w0.2: J6.3@-49.64,-31.74 ccw(c-50.749,-30.631) -49.18,-30.631 ccw(c-47.611,-30.631) J6.3@-48.72,-31.74 ; J6.3@-49.498,-31.882 ccw(c-50.266,-31.114) -49.18,-31.114 ccw(c-48.094,-31.114) J6.3@-48.862,-31.882 ; J6.3@-49.18,-32.2 -49.18,-21.48 -42.6,-14.9 -42.6,-13.7 IC2.79@-41,-12.1 ; IC2.79@-41.4,-12.1 cw(c-42.366,-12.1) -41.683,-12.783 cw(c-41,-13.466) IC2.79@-41,-12.5
USB_D+: IC2.8 USB1.3 | length 24.6
  Bottom Layer w0.4: USB1.3@-41.76,29.897 cw(c-41.76,28.847) -41.017,29.589 cw(c-40.275,30.332) USB1.3@-41.325,30.332 ; USB1.3@-41.76,30.332 -37.541,26.113 -37.541,24.733 -34.1,21.292 -34.1,13 -35,12.1 IC2.8@-35,11.9 ; IC2.8@-34.7,11.9 cw(c-33.493,11.9) -34.346,12.754
USB_D-: IC2.7 USB1.2 | length 19.6
  Bottom Layer w0.5: USB1.2@-41.76,27.915 cw(c-41.76,26.986) -41.103,27.643 cw(c-40.446,28.3) USB1.2@-41.375,28.3 ; USB1.2@-41.76,28.3 -40.335,26.875 -40.335,25.095 -35,19.76 IC2.7@-35,13.9 ; IC2.7@-35.177,14.077 ccw(c-35.604,14.504) -35,14.504 ccw(c-34.396,14.504) IC2.7@-34.823,14.077
VCC: C1.1 C2.1 C7.1 IC1.6 P2.1 POWER.2 | length 172.3
  Top Layer w0.8: IC1.6@-58.9,11.9 -57.9,12.9 ; IC1.6@-58.9,13.9 -57.9,12.9 ; C7.1@-57.147,29.153 cw(c-57.745,28.555) -56.9,28.555 cw(c-56.055,28.555) C7.1@-56.653,29.153 ; IC1.6@-56.9,11.9 -57.9,12.9 ; IC1.6@-56.9,13.9 C7.1@-56.9,29.4 ; C1.1@-56.6,9.3 -57.9,10.6 -57.9,12.9 ; POWER.2@-29.978,33.978 ccw(c-31.856,35.856) -29.2,35.856 ccw(c-26.544,35.856) POWER.2@-28.422,33.978 ; -29.185,37.643 -29.2,37.627 POWER.2@-29.2,33.2 -29.2,31.918 C2.1@-27.5,30.218 ; POWER.2@-28.914,33.11 ccw(c-27.058,32.527) -28.433,31.151 ; POWER.2@-28.151,32.87 ccw(c-25.637,32.081) C2.1@-27.5,30.218 ; -27.793,30.511 cw(c-28.404,29.9) C2.1@-27.54,29.9 ; -27.602,30.395 cw(c-28.156,30.076) C2.1@-27.539,29.91 ; C2.1@-27.5,29.9 C2.1@-27.5,30.218
  Top Layer w1: C7.1@-56.9,29.4 -48.657,37.643 -29.215,37.643 -29.2,37.627 ; -29.185,37.643 46.609,37.643 50.6,33.652 P2.1@50.6,17.9
VCOM: P2.2 U34.10 U39.10 | length 30.9
  Top Layer w0.8: v1(34.56,18.729) U39.10@34.56,21.65 ; U34.10@46.86,21.65 46.86,19.1 P2.2@50.6,15.36 ; P2.2@50.25,15.36 ccw(c49.405,15.36) 50.003,15.957 ccw(c50.6,16.555) P2.2@50.6,15.71
  Bottom Layer w0.8: v1(34.56,18.729) 37.929,15.36 P2.2@50.6,15.36 ; P2.2@50.353,15.113 ccw(c49.755,14.515) 49.755,15.36 ccw(c49.755,16.205) P2.2@50.353,15.607
pads on no net: Batt.0 IC2.14 IC2.15 IC2.16 IC2.21 IC2.22 IC2.37 IC2.38 IC2.41 IC2.45 IC2.69 IC2.70 IC2.75 IC2.76 IC2.77 IC2.78 U6.5 U39.5 U39.6 U39.7 U39.8 U39.11 U39.12 U39.13 U39.14

## Polygon pours and split planes (outlines as drawn)
GND on Bottom Layer "Top Overlay-No Net" (hatched 90Degree grid 0.508 track 0.203, remove dead copper, pour order 3): -61.2,43.637 -61.2,-43.7 61.2,-43.7 61.2,43.7 -61.2,43.7
GND on Top Layer "Top Overlay-No Net" (hatched 90Degree grid 0.508 track 0.203, remove dead copper, pour order 4): -61.2,-43.7 61.2,-43.7 61.2,43.7 -61.2,43.7 -61.2,-43.7

## Keep-outs
Keep-Out Layer:
  lines w0.254: -61.2,-15.215 -51.714,-15.215 -51.714,-29.388 -55.042,-32.715 -61.138,-32.715 ; -61.2,-43.7 -61.2,43.7 61.2,43.7 61.2,-43.7 -61.2,-43.7

## Other copper
Top Layer:
  rectangle net +3.3V: -52.045,-14.605 -48.819,-11.481
  rectangle net +3.3V: -50.724,-11.481 -49.53,-8.738
  rectangle net +5V: -46.05,-14.707 -42.799,-11.481
  rectangle net +5V: -45.441,-11.481 -43.764,-8.788
  rectangle net VCC: -59.487,11.328 -56.236,14.503

## Silkscreen, mask and mechanical layers (free items; w line width, h text height)
Top Overlay:
  lines w0.254: -61.2,-35 -50,-35 -50,-43.7 ; -61.2,35 -50,35 -50,43.7 ; 50,-43.7 50,-35 61.2,-35 ; 50,43.7 50,35 61.2,35
  text "PE15" at 45.847,36.779 h1
  text "PE13" at 35.966,36.728 h1
  text "PE14" at 41.123,36.728 h1
  text "PE10" at 21.057,36.703 h1
  text "PE11" at 26.238,36.703 h1
  text "PE7" at 5.842,36.678 h1
  text "PE5" at -4.496,36.652 h1
  text "PE6" at 1.041,36.652 h1
  text "PE8" at 10.77,36.652 h1
  text "PE9" at 15.799,36.652 h1
  text "PE12" at 30.861,36.652 h1
  text "PE4" at -9.728,36.627 h1
  text "PD8" at -20.015,36.576 h0.8
  text "PD9" at -14.859,36.5 h0.8
  text "RESET" at -35.789,30.683 h0.8
  text "O6" at 20.803,30.607 h0.8
  text "GND" at -24.892,30.531 h0.8
  text "O5" at 25.959,30.531 h0.8
  text "O4" at 31.013,30.48 h0.8
  text "VCC" at -30.81,30.455 h0.8
  text "I2" at 10.922,30.455 h0.8
  text "I6" at -9.347,30.429 h0.8
  text "O3" at 36.043,30.429 h0.8
  text "I3" at 5.944,30.404 h0.8
  text "I1" at 16.078,30.378 h0.8
  text "I5" at -4.293,30.353 h0.8
  text "I4" at 0.762,30.353 h0.8
  text "O2" at 41.275,30.277 h0.8
  text "485B" at -15.265,30.226 h0.8
  text "485A" at -20.625,30.074 h0.8
  text "O1" at 46.761,30.023 h0.8
  text "PB2" at -47.904,19.583 h0.8
  text "月无声® YWS®" at 55.27,-5.766 h5 r270
  text "电机控制V1.3" at -5.309,-8.661 h5
  text "阿波罗工业控制器" at 51.333,-8.915 h4 r270
  text "RX1" at -19.964,-30.759 h0.8
  text "TX1" at -14.783,-30.81 h0.8
  text "P3-" at 25.476,-30.81 h0.8
  text "P1-" at -4.42,-30.836 h0.8
  text "DR1" at 0.279,-30.836 h0.8
  text "P2+" at 5.283,-30.836 h0.8
  text "P2-" at 10.389,-30.836 h0.8
  text "P3+" at 20.599,-30.836 h0.8
  text "P4-" at 40.869,-30.836 h0.8
  text "DR2" at 15.494,-30.861 h0.8
  text "DR3" at 30.836,-30.861 h0.8
  text "P4+" at 35.839,-30.912 h0.8
  text "DR4" at 45.999,-30.912 h0.8
  text "P1+" at -9.55,-30.963 h0.8
  text "G" at -33.858,-34.036 h0.6
  text "GND" at -44.602,-34.087 h0.8
  text "V" at -41.859,-34.087 h0.6
  text "IO" at -39.192,-34.087 h0.6
  text "CK" at -36.728,-34.087 h0.6
  text "PC11" at -47.219,-34.163 h0.8
  text "PC10" at -49.987,-34.188 h0.8
  text "V3.3" at -52.476,-34.239 h0.8
  text "PA8" at -7.188,-35.23 h1
  text "PD15" at 38.532,-35.23 h1
  text "PA1" at 8.534,-35.255 h1
  text "PC7" at 23.47,-35.281 h1
  text "PE1" at 15.723,-36.805 h1
  text "PE2" at 31.09,-36.805 h1
  text "PE4" at 46.101,-36.855 h1
  text "PE0" at 0.457,-36.957 h1
  text "LO" at -30.226,-37.059 h0.8
  text "HO" at -24.536,-37.16 h0.8
  text "PA10" at -19.964,-37.211 h0.8
  text "PA9" at -14.351,-37.211 h0.8
  text "PD12" at -48.412,-37.313 h0.6
  text "PD11" at -45.745,-37.313 h0.6
  text "PD4" at -42.951,-37.363 h0.6
  text "PD6" at -37.719,-37.363 h0.6
  text "PD5" at -40.259,-37.389 h0.6
  text "PD7" at -35.281,-37.414 h0.6
  text "PA9" at -30.124,-38.176 h0.8
  text "PA8" at -24.714,-38.176 h0.8
  text "RS232" at -17.602,-38.532 h0.8
  text "COM1" at -17.577,-39.7 h0.8
  text "S5" at -45.161,-40.818 h0.8
  text "S3" at -40.056,-40.818 h0.8
  text "S6" at -47.625,-40.869 h0.8
  text "S1" at -37.44,-40.869 h0.8
  text "S1" at -34.747,-40.869 h0.8
  text "S4" at -42.596,-40.919 h0.8
Bottom Overlay:
  text "东莞市月无声电子" at 36.119,-7.722 h5
  text "www.yuewusheng.com" at 40.894,-12.776 h5

## Dimensions
-61.2,43.7 to -61.2,-43.7 on Top Overlay
-61.2,-43.7 to 61.2,-43.7 on Top Overlay
-50,43.7 to 50,43.7 on Top Overlay
-61.2,35 to -61.2,-35 on Top Overlay